# EAGLE board gpio-board (EAGLE 9.6.2)
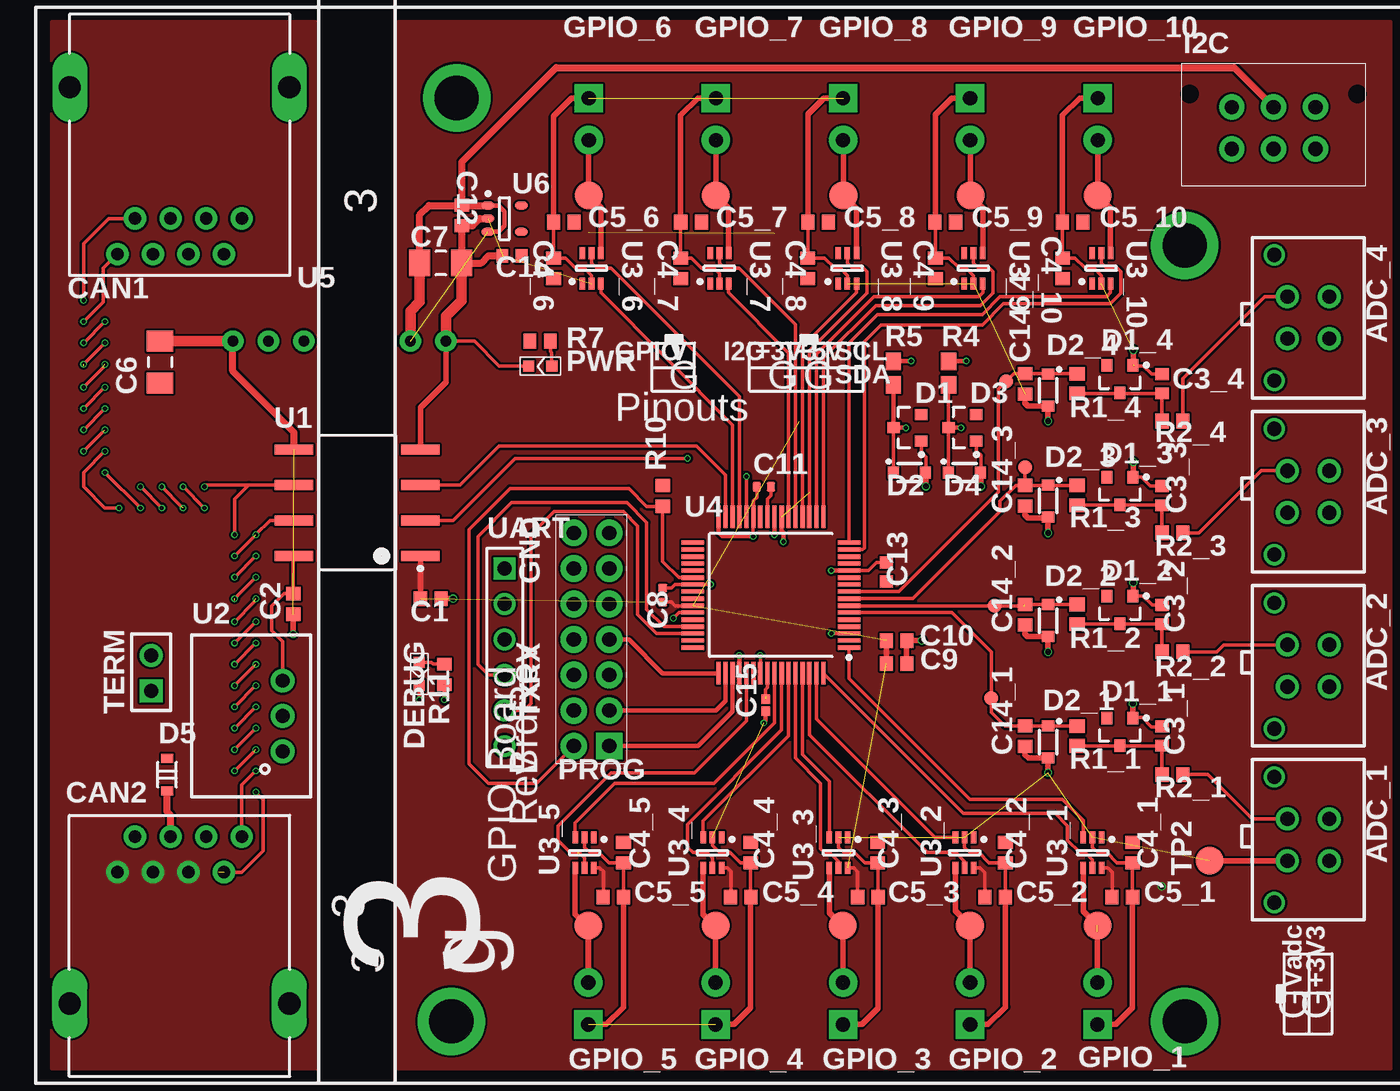
[diagram p0: board, top side]
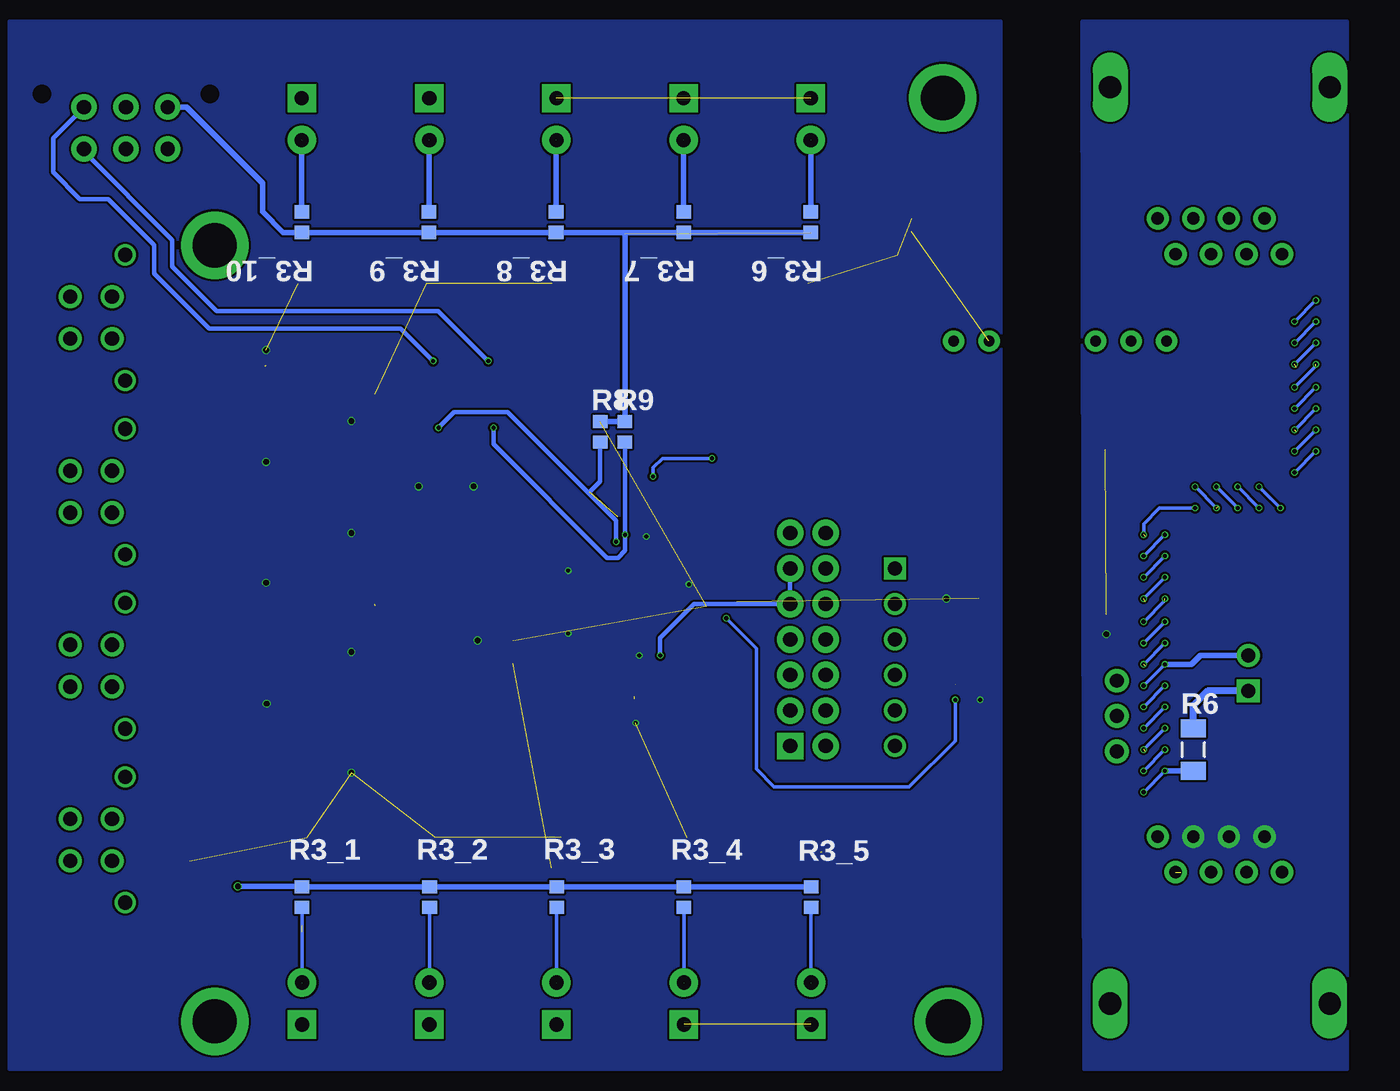
[diagram p1: board, bottom side, seen from below]

No outline drawn. Coordinates in mm, seen from the top.
Copper layers (1*16): Top 0.035mm / dielectric 1.5mm / Bottom 0.035mm
Design rules "GPIO Board": minimum track width 6mil, minimum drill 0.35mm, track to track 6mil, track to pad 6mil, pad to pad 6mil, via to via 6mil, smd to smd 6mil, copper to edge 40mil, drill to drill 6mil, minimum pad ring 0mil, minimum via ring 0mil, stop-mask expansion 4mil, vias tented up to drill 0mil, thermal gap 10mil

## Footprints (pad centres in the part's own frame; a part is rotated, then mirrored left to right if it is on the bottom)
PCB-DEII51DOH0YLT05YINNA-1_1PRIMARY = drill 1.016 pad 1.524: 1 -5.994,3.937; 2 2.997,3.937 | drill 1.016 pad 1.651: 3 0,0; 4 -2.997,0; 5 0,2.997; 6 -2.997,2.997
CAPC1608X90X35ML10T15_1PRIMARY = smd 0.94 x 1.041: 1 -0.737,0; 2 0.737,0
PCB-D6AJCE48RKQ1HIVISM3Y-1_1PRIMARY = smd 0.838 x 0.94: 1 -0.686,0; 2 0.686,0
CAPC3216X94X50ML20T25_1PRIMARY = smd 1.499 x 1.905: 1 -1.499,0; 2 1.499,0
PCB-RS1RQ4I227AAQDZS4V5U-1_1PRIMARY = smd 0.61 x 0.66: 1 -0.508,0; 2 0.508,0
CAPC1005X55X25NL05T10_1PRIMARY = smd 0.66 x 0.61: 1 -0.432,0; 2 0.432,0
PCB-617644-1_1PRIMARY = drill 0.889 pad 1.6: 1 -4.445,6.35; 2 -3.175,8.89; 3 -1.905,6.35; 4 -0.635,8.89; 5 0.635,6.35; 6 1.905,8.89; 7 3.175,6.35; 8 4.445,8.89 | drill 1.6 pad 2.489 long: 9 -7.849,-3.048; 10 7.849,-3.048
PCB-617644-1_2PRIMARY = drill 0.889 pad 1.6: 1 -4.445,6.35; 2 -3.175,8.89; 3 -1.905,6.35; 4 -0.635,8.89; 5 0.635,6.35; 6 1.905,8.89; 7 3.175,6.35; 8 4.445,8.89 | drill 1.6 pad 2.489 long: 9 7.849,-3.048; 10 -7.849,-3.048
PCB-826HQ61C5HRMK636OS7I-1_1PRIMARY = smd 0.889 x 0.787: 1 -0.991,0.94; 2 -0.991,-0.94; 3 0.991,0
PCB-LEB5SPC6MITBTSBK5TX6-1_1PRIMARY = smd 0.787 x 0.889: 1 0,0; 2 2.286,0
PCB-I0FBSBJYI21MW6A9P1H2-1_1PRIMARY = smd 0.635 x 0.838: 1 -1.143,0; 2 1.168,0
PCB-49LZSAGIYOPML94DMXSO-1_1PRIMARY = smd 0.787 x 0.787: 1 0.889,1.143; 2 2.54,1.143
P:EX190Y190D1251 = drill 3.175 pad 4.826: 1 0,0
PCB-EBANZHXDR8KRO84SZ5US-1_1PRIMARY = drill 1.016 pad 2.032 square: 1 0.991,-1.499 | drill 1.016 pad 2.032: 2 0.991,1.499
PCB-8Y24NF48ZEBEN9QZAJWL-1_1PRIMARY = drill 1.016 pad 1.803: 1 2.997,-2.997; 2 0,-2.997; 3 -2.997,-2.997; 4 2.997,0; 5 0,0; 6 -2.997,0 | drill 1.016 pad 1.016: 7 -5.994,0.94 | drill 1.016 pad 0.991: 8 5.994,0.94
PCB-VVNC32FXY3RXRFE3EZXP-1_1PRIMARY = drill 1.016 pad 1.905 square: 1 -7.62,-1.27 | drill 1.016 pad 1.905: 2 -7.62,1.27; 3 -5.08,-1.27; 4 -5.08,1.27; 5 -2.54,-1.27; 6 -2.54,1.27; 7 0,-1.27; 8 0,1.27; 9 2.54,-1.27; 10 2.54,1.27; 11 5.08,-1.27; 12 5.08,1.27; 13 7.62,-1.27; 14 7.62,1.27
PCB-PZR69ND8R73CHJ6EB9MQ-1_1PRIMARY = smd 0.991 x 1.092: 1 -0.711,0; 2 0.711,0
PCB-PZR69ND8R73CHJ6EB9MQ-1_2PRIMARY = smd 0.991 x 1.092: 1 -0.737,0; 2 0.66,0
PCB-2KQ0Q186M0A2Q7QR8G59-1_1PRIMARY = smd 0.94 x 1.041: 1 -0.737,0; 2 0.737,0
PCB-0L9YF81OQ53TI1Q912G7-1_1PRIMARY = smd 0.94 x 1.041: 1 -0.737,0; 2 0.737,0
PCB-2RBVLBEZ7GB2PG7HRA0P-1_1PRIMARY = smd 1.245 x 1.092: 1 -0.838,0; 2 0.838,0
RESC3216X70X50ML05T20_1PRIMARY = smd 1.295 x 1.753: 1 -1.524,0; 2 1.524,0
RESC1608X55X30ML15T15_1PRIMARY = smd 0.889 x 1.041: 1 -0.737,0; 2 0.737,0
PCB-YWUYZLJSEFP2PSQ2ZQH0-1_1PRIMARY = drill 1.016 pad 1.651 square: 1 -1.27,0 | drill 1.016 pad 1.651: 2 1.27,0
PCB-KZRZ332CMU8NBWTQD8UW-1_2PRIMARY = smd 2.007 x 2.007: 1 0,0
PCB-KZRZ332CMU8NBWTQD8UW-1_1PRIMARY = smd 0.991 x 0.991: 1 0,0
PCB-DV9O3AVLIIB4ETIW6Y3O-1_1PRIMARY = smd 2.743 x 0.711: 1 -4.521,3.81; 2 -4.521,1.27; 3 -4.521,-1.27; 4 -4.521,-3.81; 5 4.521,-3.81; 6 4.521,-1.27; 7 4.521,1.27; 8 4.521,3.81
PCB-YSM4WBM1VT1WQ7B8B8LJ-1_1PRIMARY = drill 0.991 pad 1.702: 1 -2.54,0; 2 0,0; 3 2.515,0
PCB-U1BF8RHDO4XCF1EB4J2A-1_1PRIMARY = smd 0.838 x 0.406: 1 -1.092,0.66; 2 -1.092,0; 3 -1.092,-0.66; 4 1.092,-0.66; 5 1.092,0; 6 1.092,0.66
TI-PM-64_V_1PRIMARY = smd 0.305 x 1.6: 1 -3.759,-5.588; 2 -3.251,-5.588; 3 -2.743,-5.588; 4 -2.261,-5.588; 5 -1.753,-5.588; 6 -1.245,-5.588; 7 -0.762,-5.588; 8 -0.254,-5.588; 9 0.254,-5.588; 10 0.762,-5.588; 11 1.245,-5.588; 12 1.753,-5.588; 13 2.261,-5.588; 14 2.743,-5.588; 15 3.251,-5.588; 16 3.759,-5.588; 33 3.759,5.588; 34 3.251,5.588; 35 2.743,5.588; 36 2.261,5.588; 37 1.753,5.588; 38 1.245,5.588; 39 0.762,5.588; 40 0.254,5.588; 41 -0.254,5.588; 42 -0.762,5.588; 43 -1.245,5.588; 44 -1.753,5.588; 45 -2.261,5.588; 46 -2.743,5.588; 47 -3.251,5.588; 48 -3.759,5.588 | smd 1.6 x 0.305: 17 5.588,-3.759; 18 5.588,-3.251; 19 5.588,-2.743; 20 5.588,-2.261; 21 5.588,-1.753; 22 5.588,-1.245; 23 5.588,-0.762; 24 5.588,-0.254; 25 5.588,0.254; 26 5.588,0.762; 27 5.588,1.245; 28 5.588,1.753; 29 5.588,2.261; 30 5.588,2.743; 31 5.588,3.251; 32 5.588,3.759; 49 -5.588,3.759; 50 -5.588,3.251; 51 -5.588,2.743; 52 -5.588,2.261; 53 -5.588,1.753; 54 -5.588,1.245; 55 -5.588,0.762; 56 -5.588,0.254; 57 -5.588,-0.254; 58 -5.588,-0.762; 59 -5.588,-1.245; 60 -5.588,-1.753; 61 -5.588,-2.261; 62 -5.588,-2.743; 63 -5.588,-3.251; 64 -5.588,-3.759
PCB-KC945RGRSQCX7MCRR5DR-1_1PRIMARY = drill 0.762 pad 1.524: 1 0,0; 2 -2.54,0; 3 -5.08,0; 4 -12.7,0; 5 -15.24,0
PCB-DJS7SZGBAKRF40B0AEIK-1_1PRIMARY = smd 0.889 x 0.559: 1 -1.194,0.94; 2 -1.194,0; 3 -1.194,-0.94; 4 1.194,-0.94; 5 1.194,0.94
PCB-EWXEYP75JDH83BBP67M9-1_1PRIMARY = drill 1.016 pad 1.549 square: 1 0,0 | drill 1.016 pad 1.549: 2 2.54,0; 3 5.08,0; 4 7.62,0; 5 10.16,0; 6 12.7,0

## Placement (x,y rotation side)
ADC_1  Molex_43045-0412  [PCB-DEII51DOH0YLT05YINNA-1_1PRIMARY]  117.91,58.42 90 top
ADC_2  Molex_43045-0412  [PCB-DEII51DOH0YLT05YINNA-1_1PRIMARY]  117.91,70.87 90 top
ADC_3  Molex_43045-0412  [PCB-DEII51DOH0YLT05YINNA-1_1PRIMARY]  117.91,83.31 90 top
ADC_4  Molex_43045-0412  [PCB-DEII51DOH0YLT05YINNA-1_1PRIMARY]  117.91,95.76 90 top
C1  0.1uF  [CAPC1608X90X35ML10T15_1PRIMARY]  53.64,74.17 0 top
C2  0.1uF  [CAPC1608X90X35ML10T15_1PRIMARY]  43.81,73.79 270 top
C3_1  Murata_GRT188C8YA225KE13D  [PCB-D6AJCE48RKQ1HIVISM3Y-1_1PRIMARY]  105.94,64.34 270 top
C3_2  Murata_GRT188C8YA225KE13D  [PCB-D6AJCE48RKQ1HIVISM3Y-1_1PRIMARY]  105.94,73.03 270 top
C3_3  Murata_GRT188C8YA225KE13D  [PCB-D6AJCE48RKQ1HIVISM3Y-1_1PRIMARY]  105.94,81.53 270 top
C3_4  Murata_GRT188C8YA225KE13D  [PCB-D6AJCE48RKQ1HIVISM3Y-1_1PRIMARY]  105.94,89.53 270 top
C4_1  0.1uF  [CAPC1608X90X35ML10T15_1PRIMARY]  103.84,56.01 270 top
C4_2  0.1uF  [CAPC1608X90X35ML10T15_1PRIMARY]  94.74,56.01 270 top
C4_3  0.1uF  [CAPC1608X90X35ML10T15_1PRIMARY]  85.62,56.01 270 top
C4_4  0.1uF  [CAPC1608X90X35ML10T15_1PRIMARY]  76.53,56.01 270 top
C4_5  0.1uF  [CAPC1608X90X35ML10T15_1PRIMARY]  67.44,56.01 270 top
C4_6  0.1uF  [CAPC1608X90X35ML10T15_1PRIMARY]  62.43,97.79 90 top
C4_7  0.1uF  [CAPC1608X90X35ML10T15_1PRIMARY]  71.53,97.79 90 top
C4_8  0.1uF  [CAPC1608X90X35ML10T15_1PRIMARY]  80.62,97.79 90 top
C4_9  0.1uF  [CAPC1608X90X35ML10T15_1PRIMARY]  89.74,97.79 90 top
C4_10  0.1uF  [CAPC1608X90X35ML10T15_1PRIMARY]  98.83,97.79 90 top
C5_1  0.1uF  [CAPC1608X90X35ML10T15_1PRIMARY]  103.1,52.83 0 top
C5_2  0.1uF  [CAPC1608X90X35ML10T15_1PRIMARY]  94.01,52.83 0 top
C5_3  0.1uF  [CAPC1608X90X35ML10T15_1PRIMARY]  84.91,52.83 0 top
C5_4  0.1uF  [CAPC1608X90X35ML10T15_1PRIMARY]  75.82,52.83 0 top
C5_5  0.1uF  [CAPC1608X90X35ML10T15_1PRIMARY]  66.7,52.83 0 top
C5_6  0.1uF  [CAPC1608X90X35ML10T15_1PRIMARY]  63.17,101.09 180 top
C5_7  0.1uF  [CAPC1608X90X35ML10T15_1PRIMARY]  72.26,101.09 180 top
C5_8  0.1uF  [CAPC1608X90X35ML10T15_1PRIMARY]  81.36,101.09 180 top
C5_9  0.1uF  [CAPC1608X90X35ML10T15_1PRIMARY]  90.45,101.09 180 top
C5_10  0.1uF  [CAPC1608X90X35ML10T15_1PRIMARY]  99.54,101.09 180 top
C6  TDK_CGA5L1X7R1E106K160AC  [CAPC3216X94X50ML20T25_1PRIMARY]  34.29,91.08 270 top
C7  TDK_CGA5L1X7R1E106K160AC  [CAPC3216X94X50ML20T25_1PRIMARY]  54.36,98.17 180 top
C8  Murata_GCM155R71C104KA55D  [PCB-RS1RQ4I227AAQDZS4V5U-1_1PRIMARY]  70.23,74.42 270 top
C9  Murata_GCM188R72A103KA37D  [CAPC1608X90X35ML10T15_1PRIMARY]  86.97,69.52 180 top
C10  0.1uF  [CAPC1608X90X35ML10T15_1PRIMARY]  86.97,71.17 0 top
C11  Murata_GCM155R71C104KA55D  [PCB-RS1RQ4I227AAQDZS4V5U-1_1PRIMARY]  77.47,82.17 0 top
C12  0.1uF  [CAPC1608X90X35ML10T15_1PRIMARY]  55.88,101.57 270 top
C13  Murata_GRT188C8YA225KE13D  [PCB-D6AJCE48RKQ1HIVISM3Y-1_1PRIMARY]  86.23,76.07 270 top
C14_1  Murata_GCM188R72A103KA37D  [CAPC1608X90X35ML10T15_1PRIMARY]  96.14,64.34 90 top
C14_2  Murata_GCM188R72A103KA37D  [CAPC1608X90X35ML10T15_1PRIMARY]  96.14,73.03 90 top
C14_3  Murata_GCM188R72A103KA37D  [CAPC1608X90X35ML10T15_1PRIMARY]  96.14,81.53 90 top
C14_4  Murata_GCM188R72A103KA37D  [CAPC1608X90X35ML10T15_1PRIMARY]  96.14,89.53 90 top
C15  Cap  [CAPC1005X55X25NL05T10_1PRIMARY]  77.6,66.55 90 top
C16  Murata_GRT188C8YA225KE13D  [PCB-D6AJCE48RKQ1HIVISM3Y-1_1PRIMARY]  59.46,98.68 0 top
CAN1  Assmann_A-2004-2-4-LPS-N-R  [PCB-617644-1_1PRIMARY]  35.69,107.7 180 top
CAN2  Assmann_A-2004-2-4-LPS-N-R  [PCB-617644-1_2PRIMARY]  35.69,48.26 0 top
D1  BZX84B5V1LT1G  [PCB-826HQ61C5HRMK636OS7I-1_1PRIMARY]  87.73,86.39 180 top
D1_1  BZX84B5V1LT1G  [PCB-826HQ61C5HRMK636OS7I-1_1PRIMARY]  102.92,64.64 270 top
D1_2  BZX84B5V1LT1G  [PCB-826HQ61C5HRMK636OS7I-1_1PRIMARY]  102.92,73.36 270 top
D1_3  BZX84B5V1LT1G  [PCB-826HQ61C5HRMK636OS7I-1_1PRIMARY]  102.92,81.86 270 top
D1_4  BZX84B5V1LT1G  [PCB-826HQ61C5HRMK636OS7I-1_1PRIMARY]  102.92,89.87 270 top
D2  CUS520,H3F  [PCB-LEB5SPC6MITBTSBK5TX6-1_1PRIMARY]  86.74,83.19 0 top
D2_1  CUS520,H3F  [PCB-LEB5SPC6MITBTSBK5TX6-1_1PRIMARY]  97.79,65.05 270 top
D2_2  CUS520,H3F  [PCB-LEB5SPC6MITBTSBK5TX6-1_1PRIMARY]  97.79,73.74 270 top
D2_3  CUS520,H3F  [PCB-LEB5SPC6MITBTSBK5TX6-1_1PRIMARY]  97.79,82.3 270 top
D2_4  CUS520,H3F  [PCB-LEB5SPC6MITBTSBK5TX6-1_1PRIMARY]  97.79,90.22 270 top
D3  BZX84B5V1LT1G  [PCB-826HQ61C5HRMK636OS7I-1_1PRIMARY]  91.67,86.39 180 top
D4  CUS520,H3F  [PCB-LEB5SPC6MITBTSBK5TX6-1_1PRIMARY]  90.68,83.19 0 top
D5  ESD12VD3B-TP  [PCB-I0FBSBJYI21MW6A9P1H2-1_1PRIMARY]  34.8,61.57 90 top
DEBUG  LED  [PCB-49LZSAGIYOPML94DMXSO-1_1PRIMARY]  51.69,70.48 270 top
DUMMY1  [P:EX190Y190D1251]  55.5,109.98 0 top
DUMMY2  [P:EX190Y190D1251]  55.12,43.94 0 top
DUMMY3  [P:EX190Y190D1251]  107.57,43.94 0 top
DUMMY4  [P:EX190Y190D1251]  107.57,99.44 0 top
GPIO_1  Molex_0430450212  [PCB-EBANZHXDR8KRO84SZ5US-1_1PRIMARY]  100.33,45.21 0 top
GPIO_2  Molex_0430450212  [PCB-EBANZHXDR8KRO84SZ5US-1_1PRIMARY]  91.24,45.21 0 top
GPIO_3  Molex_0430450212  [PCB-EBANZHXDR8KRO84SZ5US-1_1PRIMARY]  82.14,45.21 0 top
GPIO_4  Molex_0430450212  [PCB-EBANZHXDR8KRO84SZ5US-1_1PRIMARY]  73.03,45.21 0 top
GPIO_5  Molex_0430450212  [PCB-EBANZHXDR8KRO84SZ5US-1_1PRIMARY]  63.93,45.21 0 top
GPIO_6  Molex_0430450212  [PCB-EBANZHXDR8KRO84SZ5US-1_1PRIMARY]  65.94,108.46 180 top
GPIO_7  Molex_0430450212  [PCB-EBANZHXDR8KRO84SZ5US-1_1PRIMARY]  75.03,108.46 180 top
GPIO_8  Molex_0430450212  [PCB-EBANZHXDR8KRO84SZ5US-1_1PRIMARY]  84.12,108.46 180 top
GPIO_9  Molex_0430450212  [PCB-EBANZHXDR8KRO84SZ5US-1_1PRIMARY]  93.22,108.46 180 top
GPIO_10  Molex_0430450212  [PCB-EBANZHXDR8KRO84SZ5US-1_1PRIMARY]  102.34,108.46 180 top
I2C  Molex_43045-0613  [PCB-8Y24NF48ZEBEN9QZAJWL-1_1PRIMARY]  113.92,109.32 0 top
PROG  JTAG  [PCB-VVNC32FXY3RXRFE3EZXP-1_1PRIMARY]  65.15,71.25 90 top
PWR  LED  [PCB-49LZSAGIYOPML94DMXSO-1_1PRIMARY]  63.2,91.95 180 top
R1_1  Panasonic_ERJ-3EKF3901V  [PCB-PZR69ND8R73CHJ6EB9MQ-1_1PRIMARY]  99.87,64.34 270 top
R1_2  Panasonic_ERJ-3EKF3901V  [PCB-PZR69ND8R73CHJ6EB9MQ-1_1PRIMARY]  99.87,73.05 270 top
R1_3  Panasonic_ERJ-3EKF3901V  [PCB-PZR69ND8R73CHJ6EB9MQ-1_1PRIMARY]  99.87,81.56 270 top
R1_4  Panasonic_ERJ-3EKF3901V  [PCB-PZR69ND8R73CHJ6EB9MQ-1_2PRIMARY]  99.87,89.51 270 top
R2_1  Res1  [PCB-2KQ0Q186M0A2Q7QR8G59-1_1PRIMARY]  106.68,61.59 180 top
R2_2  Res1  [PCB-2KQ0Q186M0A2Q7QR8G59-1_1PRIMARY]  106.68,70.36 180 top
R2_3  Res1  [PCB-2KQ0Q186M0A2Q7QR8G59-1_1PRIMARY]  106.68,78.87 180 top
R2_4  Res1  [PCB-2KQ0Q186M0A2Q7QR8G59-1_1PRIMARY]  106.68,86.87 180 top
R3_1  Res1  [PCB-0L9YF81OQ53TI1Q912G7-1_1PRIMARY]  101.32,52.83 90 bottom
R3_2  Res1  [PCB-0L9YF81OQ53TI1Q912G7-1_1PRIMARY]  92.2,52.83 90 bottom
R3_3  Res1  [PCB-0L9YF81OQ53TI1Q912G7-1_1PRIMARY]  83.11,52.83 90 bottom
R3_4  Res1  [PCB-0L9YF81OQ53TI1Q912G7-1_1PRIMARY]  74.02,52.83 90 bottom
R3_5  Res1  [PCB-0L9YF81OQ53TI1Q912G7-1_1PRIMARY]  64.92,52.83 90 bottom
R3_6  Res1  [PCB-0L9YF81OQ53TI1Q912G7-1_1PRIMARY]  64.95,101.09 270 bottom
R3_7  Res1  [PCB-0L9YF81OQ53TI1Q912G7-1_1PRIMARY]  74.04,101.09 270 bottom
R3_8  Res1  [PCB-0L9YF81OQ53TI1Q912G7-1_1PRIMARY]  83.16,101.09 270 bottom
R3_9  Res1  [PCB-0L9YF81OQ53TI1Q912G7-1_1PRIMARY]  92.25,101.09 270 bottom
R3_10  Res1  [PCB-0L9YF81OQ53TI1Q912G7-1_1PRIMARY]  101.35,101.09 270 bottom
R4  Panasonic_ERJ-3GEYJ472V  [PCB-2RBVLBEZ7GB2PG7HRA0P-1_1PRIMARY]  90.68,90.3 90 top
R5  Panasonic_ERJ-3GEYJ472V  [PCB-2RBVLBEZ7GB2PG7HRA0P-1_1PRIMARY]  86.74,90.3 90 top
R6  Panasonic_ERJ-8GEYJ121V  [RESC3216X70X50ML05T20_1PRIMARY]  37.59,63.37 90 bottom
R7  Panasonic_ERJ-3GEYJ331V  [RESC1608X55X30ML15T15_1PRIMARY]  61.47,92.58 180 top
R8  Res1  [PCB-0L9YF81OQ53TI1Q912G7-1_1PRIMARY]  80.01,86.11 90 bottom
R9  Res1  [PCB-0L9YF81OQ53TI1Q912G7-1_1PRIMARY]  78.23,86.11 90 bottom
R10  Res1  [PCB-0L9YF81OQ53TI1Q912G7-1_1PRIMARY]  70.23,81.51 90 top
R11  Panasonic_ERJ-3GEYJ331V  [RESC1608X55X30ML15T15_1PRIMARY]  54.61,68.76 270 top
TERM  Samtec_TSW-102-07-G-S  [PCB-YWUYZLJSEFP2PSQ2ZQH0-1_1PRIMARY]  33.66,68.83 90 top
TP1_1  Test_Pad  [PCB-KZRZ332CMU8NBWTQD8UW-1_2PRIMARY]  101.32,50.8 90 top
TP1_2  Test_Pad  [PCB-KZRZ332CMU8NBWTQD8UW-1_2PRIMARY]  92.2,50.8 0 top
TP1_3  Test_Pad  [PCB-KZRZ332CMU8NBWTQD8UW-1_2PRIMARY]  83.11,50.8 0 top
TP1_4  Test_Pad  [PCB-KZRZ332CMU8NBWTQD8UW-1_2PRIMARY]  74.02,50.8 0 top
TP1_5  Test_Pad  [PCB-KZRZ332CMU8NBWTQD8UW-1_2PRIMARY]  64.92,50.8 0 top
TP1_6  Test_Pad  [PCB-KZRZ332CMU8NBWTQD8UW-1_2PRIMARY]  64.95,103 0 top
TP1_7  Test_Pad  [PCB-KZRZ332CMU8NBWTQD8UW-1_2PRIMARY]  74.04,103 0 top
TP1_8  Test_Pad  [PCB-KZRZ332CMU8NBWTQD8UW-1_2PRIMARY]  83.16,103 0 top
TP1_9  Test_Pad  [PCB-KZRZ332CMU8NBWTQD8UW-1_2PRIMARY]  92.25,103 90 top
TP1_10  Test_Pad  [PCB-KZRZ332CMU8NBWTQD8UW-1_2PRIMARY]  101.35,103 0 top
TP2  Test_Pad  [PCB-KZRZ332CMU8NBWTQD8UW-1_2PRIMARY]  109.35,55.42 0 top
TP3_1  Test_Pad  [PCB-KZRZ332CMU8NBWTQD8UW-1_1PRIMARY]  93.73,67.06 90 top
TP3_2  Test_Pad  [PCB-KZRZ332CMU8NBWTQD8UW-1_1PRIMARY]  93.98,73.66 90 top
TP3_3  Test_Pad  [PCB-KZRZ332CMU8NBWTQD8UW-1_1PRIMARY]  96.14,83.57 90 top
TP3_4  Test_Pad  [PCB-KZRZ332CMU8NBWTQD8UW-1_1PRIMARY]  94.79,89.71 90 top
U1  TI-ISO1050-SOP_DUB-8  [PCB-DV9O3AVLIIB4ETIW6Y3O-1_1PRIMARY]  48.39,81.03 180 top
U2  Recom_Power_R-78E5.0-0.5  [PCB-YSM4WBM1VT1WQ7B8B8LJ-1_1PRIMARY]  43.05,65.79 90 top
U3_1  SN74LVC1T45QDCKRQ1  [PCB-U1BF8RHDO4XCF1EB4J2A-1_1PRIMARY]  100.97,56.01 270 top
U3_2  SN74LVC1T45QDCKRQ1  [PCB-U1BF8RHDO4XCF1EB4J2A-1_1PRIMARY]  91.82,56.01 270 top
U3_3  SN74LVC1T45QDCKRQ1  [PCB-U1BF8RHDO4XCF1EB4J2A-1_1PRIMARY]  82.8,56.01 270 top
U3_4  SN74LVC1T45QDCKRQ1  [PCB-U1BF8RHDO4XCF1EB4J2A-1_1PRIMARY]  73.79,56.01 270 top
U3_5  SN74LVC1T45QDCKRQ1  [PCB-U1BF8RHDO4XCF1EB4J2A-1_1PRIMARY]  64.64,56.01 270 top
U3_6  SN74LVC1T45QDCKRQ1  [PCB-U1BF8RHDO4XCF1EB4J2A-1_1PRIMARY]  65.15,97.79 90 top
U3_7  SN74LVC1T45QDCKRQ1  [PCB-U1BF8RHDO4XCF1EB4J2A-1_1PRIMARY]  74.3,97.79 90 top
U3_8  SN74LVC1T45QDCKRQ1  [PCB-U1BF8RHDO4XCF1EB4J2A-1_1PRIMARY]  83.44,97.79 90 top
U3_9  SN74LVC1T45QDCKRQ1  [PCB-U1BF8RHDO4XCF1EB4J2A-1_1PRIMARY]  92.46,97.79 90 top
U3_10  SN74LVC1T45QDCKRQ1  [PCB-U1BF8RHDO4XCF1EB4J2A-1_1PRIMARY]  101.6,97.79 90 top
U4  TM4C123GH6PMIR  [TI-PM-64_V_1PRIMARY]  77.98,74.42 90 top
U5  NCS1S2405SC  [PCB-KC945RGRSQCX7MCRR5DR-1_1PRIMARY]  39.5,92.58 180 top
U6  ON_Semiconductor_NCV551SN33T1G  [PCB-DJS7SZGBAKRF40B0AEIK-1_1PRIMARY]  58.93,101.35 0 top
UART  SYM-eb5f2251e9703498-3  [PCB-EWXEYP75JDH83BBP67M9-1_1PRIMARY]  58.93,76.33 270 top

## Library data of the parts
ADC_1-ADC_4 C1 C2 C3_1-C3_4 C4_1-C4_10 C5_1-C5_10 C6-C13 C14_1-C14_4 C15 C16 CAN1 CAN2 D1 D1_1-D1_4 D2 D2_1-D2_4 D3-D5 DEBUG DUMMY1-DUMMY4 GPIO_1-GPIO_10 I2C PROG PWR R1_1-R1_4 R2_1-R2_4 R3_1-R3_10 R4-R11 TERM TP1_1-TP1_10 TP2 TP3_1-TP3_4 U1 U2 U3_1-U3_10 U4-U6 UART = GPIO Board

## Nets
CANH: CAN1.7 CAN2.7
NETC2_2: CAN2.2 CAN2.4 CAN2.6
NETC6_2: CAN2.1 CAN2.3 CAN2.5
NETC15_2: C15.2 U4.56
NETPWR_1: R7.1
NETR10_2: R11.2 U4.43
TIVAD1: U4.57
TIVAD2: U4.59
TIVAD3: U4.61
TIVAD4: U4.63
TIVAD5: U4.1
TIVAD6: U4.16
TIVAD7: U4.18
TIVAD8: U4.20
TIVAD9: U4.22
TIVAD10: U4.30
TIVADIR1: U4.53
TIVADIR2: U4.58
TIVADIR3: U4.60
TIVADIR4: U4.62
TIVADIR5: U4.64
TIVADIR6: U4.15
TIVADIR7: U4.17
TIVADIR8: U4.19
TIVADIR9: U4.21
TIVADIR10: U4.29

## Tracks (layer width: path | path; a pad name or v marks a point on that pad's centre or on a via)
CANH  (via drill 0.3 pad 0.46)  (6 unrouted)
  Top 0.254: v41.15,60.33 41.66,59.82 41.66,56.13 40.13,54.61 38.48,54.61 | v39.62,64.9 v41.15,66.42 | v39.62,61.85 41.02,63.25 | v39.62,67.94 41.02,69.34 | v39.62,70.99 v41.15,72.52 | v39.62,74.17 v41.15,75.69 | v39.62,77.22 41.02,78.61 | v35.94,82.17 v37.47,80.64 | v31.37,80.64 30.35,80.64 28.83,82.17 28.83,83.19 v30.35,84.71 | v32.89,82.17 v34.42,80.64 | v28.83,86.23 v30.35,87.76 | v28.83,89.28 30.23,90.68 | v28.83,92.46 v30.35,93.98 | v28.83,95.5 28.83,99.57 30.61,101.35 CAN1.7 | 43.87,79.76 42.16,79.76 v41.15,78.74
  Bottom 0.254: v39.62,64.9 v41.15,63.37 | v39.62,61.85 v41.15,60.33 | v39.62,67.94 v41.15,66.42 | 39.62,74.04 v41.15,72.52 | v39.62,70.99 v41.15,69.47 | v39.62,77.22 v41.15,75.69 | v41.15,78.74 41.15,79.5 40.01,80.64 v37.47,80.64 | v31.37,80.64 v32.89,82.17 | v34.42,80.64 v35.94,82.17 | v28.83,86.23 v30.35,84.71 | v28.83,89.28 v30.35,87.76 | v28.83,92.46 v30.35,90.93 | v28.83,95.5 v30.35,93.98
  Bottom 0.406: 37.59,61.85 v39.62,61.85
CANL  (via drill 0.3 pad 0.46)  (4 unrouted)
  Top 0.254: v41.15,61.85 40.13,60.83 40.13,57.53 39.75,57.15 | v39.62,63.37 v41.15,64.9 | 40.64,82.3 37.59,82.3 v37.47,82.17 | v39.62,78.74 39.62,81.28 40.64,82.3 | v39.62,66.42 v41.15,67.94 | v39.62,69.47 v41.15,70.99 | v39.62,72.52 41.02,73.91 | v39.62,75.69 v41.15,77.22 | v30.35,83.19 v32.89,80.64 | v34.42,82.17 35.81,80.77 | v28.83,84.71 30.23,86.11 | v28.83,87.76 v30.35,89.28 | v28.83,90.93 v30.35,92.46 | v28.83,93.98 30.23,95.38 30.23,97.79 31.24,98.81 | 40.64,82.3 43.87,82.3
  Bottom 0.254: v39.62,66.42 v41.15,64.9 | v39.62,63.37 v41.15,61.85 | v39.62,78.74 v41.15,77.22 | v39.62,69.47 v41.15,67.94 | v39.62,72.52 v41.15,70.99 | v39.62,75.69 v41.15,74.17 | v35.94,80.64 v37.47,82.17 | v32.89,80.64 v34.42,82.17 | v28.83,84.71 v30.35,83.19 | 28.83,90.81 v30.35,89.28 | v28.83,87.76 v30.35,86.23 | v28.83,93.98 v30.35,92.46
  Bottom 0.406: 33.66,70.1 37.08,70.1 37.72,69.47 v39.62,69.47
GND  (via drill 0.3 pad 0.46, 0.41 pad 0.56)  (14 unrouted)
  Top 0.254: 89.05,83.19 89.05,84.3 88.75,84.61 88.75,85.45 | 92.99,83.19 92.99,84.43 92.69,84.73 92.69,85.45 | 105.94,73.71 105.23,73.71 104.57,74.37 103.89,74.37 | 105.94,82.22 105.11,82.22 104.44,82.88 103.89,82.88 | 103.96,90.81 104.6,90.81 105.21,90.22 105.94,90.22 | 103.86,65.66 104.52,65.66 105.18,65 105.94,65 | 71.53,101.09 71.53,98.53 72.29,98.53 73.03,97.79 73.91,97.79 74.3,97.41 74.3,96.7 | 101.6,96.7 101.6,97.28 101.09,97.79 100.46,97.79 99.72,98.53 98.83,98.53 98.83,101.09 | 65.15,96.7 65.15,97.28 64.64,97.79 64.01,97.79 63.27,98.53 62.43,98.53 62.43,101.09 | 77.22,68.83 v77.22,70.1 | v82.3,71.68 83.57,71.68 | 80.62,101.09 80.62,98.53 81.81,98.53 82.55,97.79 82.93,97.79 83.44,97.28 83.44,96.7 | 89.74,101.09 89.74,98.53 90.7,98.53 91.44,97.79 91.95,97.79 92.46,97.28 92.46,96.7 | 73.79,57.1 73.79,56.52 74.3,56.01 75.06,56.01 75.79,55.27 76.53,55.27 76.53,52.83 | 82.8,57.1 82.8,56.39 83.19,56.01 83.95,56.01 84.68,55.27 85.62,55.27 85.62,52.83 | 103.83,52.83 103.83,55.27 102.72,55.27 101.98,56.01 101.35,56.01 100.97,56.39 100.97,57.1 | 94.74,52.83 94.74,55.27 93.57,55.27 92.84,56.01 92.2,56.01 91.82,56.39 91.82,57.1 | 67.44,52.83 67.44,55.27 66.4,55.27 65.66,56.01 65.02,56.01 64.64,56.39 64.64,57.1 | 70.23,74.93 70.87,74.93 71.12,75.18 v73.66,75.18 | 76.96,82.17 76.96,81.41 76.73,81.18 76.73,80.01 76.71,80.01 v76.71,78.61 74.47,78.61 74.22,78.87 | 86.23,76.76 85.52,76.76 84.94,76.17 83.57,76.17 | v52.83,66.93 52.83,67.94 | 60.66,90.81 58.55,90.81 56.77,92.58 54.74,92.58
  Top 0.305: 77.6,66.12 77.6,65.41 v77.47,65.28 | v82.3,76.17 83.57,76.17 | 74.22,78.87 74.22,80.01
  Top 0.406: 109.35,55.42 114.91,55.42 | v92.99,82.19 92.99,83.19 | v89.05,82.19 89.05,83.19 | 103.89,74.37 v103.89,75.31 | v97.79,78.87 97.79,79.93 96.34,79.93 96.14,80.14 96.14,80.8 | v97.79,86.87 97.79,87.94 96.34,87.94 96.14,88.14 96.14,88.8 | 103.89,82.88 v103.89,83.95 | 103.89,90.88 v103.89,91.95 | 103.86,65.66 v103.86,66.65 | 54.74,92.58 54.74,89.66 52.91,87.83 52.91,84.84 | 101.35,109.96 100.05,109.96 98.83,108.74 98.83,101.09 | 92.25,109.96 90.91,109.96 89.74,108.79 89.74,101.09 | 83.16,109.96 81.76,109.96 80.62,108.81 80.62,101.09 | 74.04,109.96 72.75,109.96 71.53,108.74 71.53,101.09 | 64.95,109.96 63.73,109.96 62.43,108.66 62.43,101.09 | 103.83,52.83 103.83,44.91 102.64,43.71 101.32,43.71 | 94.74,52.83 94.74,44.96 93.5,43.71 92.2,43.71 | 85.62,52.83 85.62,44.86 84.48,43.71 83.11,43.71 | 76.53,52.83 76.53,44.91 75.34,43.71 74.02,43.71 | 64.92,43.71 66.19,43.71 67.44,44.96 67.44,52.83 | 54.36,74.17 v55.24,74.17 | 87.68,69.52 87.68,71.17 v88.77,71.17 | v97.79,70.36 97.79,71.45 96.32,71.45 96.14,71.63 96.14,72.29 | v97.79,61.72 97.79,62.76 96.37,62.76 96.14,62.99 96.14,63.6
  Top 0.508: 55.85,98.17 57.28,98.17 57.78,98.68 58.78,98.68 | 55.88,98.2 55.88,100.84 56.64,100.84 57.15,101.35 57.73,101.35
  Top 0.762: 55.85,98.17 55.85,95.48 54.74,94.36 54.74,92.58
  pour Bottom (no thermals): 51.31,115.44 122.3,115.44 122.3,40.51 51.31,40.51
NETADC_1_3
  Top 0.254: 114.91,58.42 112.39,58.42 109.22,61.59 107.42,61.59
NETADC_2_3
  Top 0.254: 114.91,70.87 110.36,70.87 109.86,70.36 107.42,70.36
NETADC_3_3
  Top 0.254: 107.42,78.87 108.58,78.87 113.03,83.31 114.91,83.31
NETADC_4_3
  Top 0.254: 114.91,95.76 113.28,95.76 107.42,89.89 107.42,86.87
NETC2_1
  Top 0.254: 43.87,77.22 43.81,77.17 43.81,74.52 43.16,74.52 42.29,73.66 42.29,71.88 43.05,71.12 43.05,68.3
NETC2_2  (via drill 0.41 pad 0.56)  (1 unrouted)
  Top 0.406: v43.81,71.63 43.81,73.05
  Top 0.508: CAN2.4 35.05,58.67 34.8,58.93 34.8,60.43 | 43.87,84.84 43.87,86.06 39.5,90.42 39.5,92.58
  Top 0.762: 34.31,92.58 39.5,92.58
  pour Bottom (no thermals): 26.54,115.44 45.59,115.44 45.47,40.51 26.54,40.51
NETC3_1_2
  Top 0.254: 105.94,61.59 105.94,63.65 99.87,63.65
NETC3_2_2
  Top 0.254: 105.94,70.36 105.94,72.34 99.57,72.34
NETC3_3_2
  Top 0.254: 105.94,78.87 105.94,80.85 99.87,80.85
NETC3_4_2
  Top 0.254: 99.87,88.85 105.94,88.85 105.94,86.87
NETC6_2
  pour Top (no thermals): 26.54,115.44 45.59,115.44 45.47,40.51 26.54,40.51
NETC7_2  (1 unrouted)
  Top 0.305: 57.73,100.41 58.5,100.41 58.93,100.84 58.93,101.85 58.5,102.29 57.73,102.29
  Top 0.508: 56.13,102.29 57.73,102.29 | 52.86,98.17 52.86,101.62 53.52,102.29 55.88,102.29 55.88,105.41 62.61,112.14 111.1,112.14 113.92,109.32
  Top 0.762: 52.86,98.17 52.86,95.4 52.2,94.74 52.2,92.58
NETC11_2
  Top 0.254: 77.98,82.17 77.98,81.53 77.72,81.28 77.72,80.01
NETC15_2  (1 unrouted)
  Top 0.254: U4.56 77.72,67.82 77.6,67.69 77.6,67.18
NETD1_3  (via drill 0.3 pad 0.46)
  Top 0.254: 86.74,83.19 86.74,86.39
  Top 0.305: v87.63,86.39 86.74,86.39 86.74,89.69 | v78.23,78.74 78.23,80.01
  Bottom 0.305: 78.23,85.37 v78.23,78.74 78.23,77.6 78.74,77.09 79.5,77.09 87.63,85.22 v87.63,86.39
NETD3_3  (via drill 0.3 pad 0.46)  (1 unrouted)
  Top 0.254: 90.68,83.19 90.68,86.39 90.68,89.69
  Top 0.305: 90.68,86.39 v91.57,86.39 | 78.74,80.01 78.74,78.99 78.87,78.87 v78.87,78.23
  Bottom 0.305: v91.57,86.39 90.45,87.5 86.61,87.5 78.87,79.76 v78.87,78.23 | 80.01,85.37 80.01,82.55 80.77,81.79
NETDEBUG_1
  Top 0.254: 54.61,69.49 53.82,69.49 53.72,69.6 52.83,69.6
NETGPIO_1_2  (2 unrouted)
  Top 0.406: 101.32,50.8 100.31,51.79 100.31,54.91 | 101.32,46.71 101.32,50.34
  Bottom 0.254: 101.32,46.71 101.32,52.09
NETGPIO_2_2  (1 unrouted)
  Top 0.406: 91.16,54.91 91.16,51.84 92.2,50.8 92.2,46.71
  Bottom 0.254: 92.2,46.71 92.2,52.09
NETGPIO_3_2  (1 unrouted)
  Top 0.406: 82.14,54.91 82.14,51.71 83.11,50.75 83.11,46.71
  Bottom 0.254: 83.11,46.71 83.11,52.09
NETGPIO_4_2  (1 unrouted)
  Top 0.406: 73.13,54.91 73.13,51.59 74.02,50.7 74.02,46.71
  Bottom 0.254: 74.02,46.71 74.02,52.09
NETGPIO_5_2  (1 unrouted)
  Top 0.406: 64.92,50.65 63.98,51.59 63.98,54.91
  Top 0.432: 64.92,46.71 64.92,50.65
  Bottom 0.254: 64.92,46.71 64.92,52.09
NETGPIO_6_2  (1 unrouted)
  Top 0.406: 64.95,106.96 64.95,103 65.81,102.16 65.81,98.88
  Bottom 0.406: 64.95,101.83 64.95,106.96
NETGPIO_7_2  (1 unrouted)
  Top 0.406: 74.04,106.96 74.04,103 74.95,102.11 74.95,98.88
  Bottom 0.406: 74.04,101.83 74.04,106.96
NETGPIO_8_2  (1 unrouted)
  Top 0.406: 83.16,106.96 83.16,103 84.1,102.06 84.1,98.88
  Bottom 0.406: 83.16,101.83 83.16,106.96
NETGPIO_9_2  (1 unrouted)
  Top 0.406: 92.25,106.96 92.25,103 93.12,102.13 93.12,98.88
  Bottom 0.406: 92.25,101.83 92.25,106.96
NETGPIO_10_2  (1 unrouted)
  Top 0.406: 101.35,106.96 101.35,103 102.26,102.08 102.26,98.88
  Bottom 0.406: 101.35,101.83 101.35,106.96
NETI2C_1  (via drill 0.3 pad 0.46)
  Top 0.305: 86.74,91.16 v88.01,91.16
  Bottom 0.305: 116.92,106.32 116.92,106.12 110.62,99.82 110.62,97.92 107.44,94.74 91.59,94.74 v88.01,91.16
NETI2C_4  (via drill 0.3 pad 0.46)
  Top 0.305: 90.68,91.16 v91.95,91.16
  Bottom 0.305: 116.92,109.32 119.13,107.11 119.13,104.65 117.22,102.74 115.19,102.74 111.89,99.44 111.89,97.41 107.95,93.47 94.26,93.47 v91.95,91.16
NETPWR_1
  Top 0.254: R7.1 62.2,91.85 62.31,91.77 62.31,90.81
NETR6_2
  Bottom 0.508: 33.66,67.56 36.58,67.56 37.59,66.55 37.59,64.9
NETR10_2  (via drill 0.3 pad 0.46)  (1 unrouted)
  Top 0.254: U4.43 71.4,73.18 v70.99,72.77 | v54.61,66.93 54.61,68.05
  Bottom 0.254: v70.99,72.77 68.83,70.61 68.83,61.98 67.56,60.71 57.91,60.71 54.61,64.01 v54.61,66.93
NETU1_2  (via drill 0.3 pad 0.46)
  Top 0.254: 76.22,80.01 v76.22,82.91 | 52.91,79.76 55.24,79.76 59.69,84.2 v72.01,84.2
  Bottom 0.254: v72.01,84.2 75.56,84.2 76.22,83.54 v76.22,82.91
NETU1_3
  Top 0.254: 74.73,80.01 74.73,83.01 72.64,85.09 58.55,85.09 55.75,82.3 52.91,82.3
PWR  (via drill 0.41 pad 0.56)  (5 unrouted)
  Top 0.254: 75.13,52.83 75.13,54.66 74.88,54.91 74.45,54.91 | 101.62,54.91 102.06,54.91 102.39,54.59 102.39,52.83 | 92.48,54.91 92.91,54.91 93.27,54.56 93.27,52.83 | 83.46,54.91 83.9,54.91 84.18,54.63 84.18,52.83 | 65.99,52.83 65.99,54.66 65.73,54.91 65.3,54.91 | 70.23,73.91 70.87,73.91 71.12,73.66 72.39,73.66
  Top 0.406: 52.91,74.17 52.91,77.22 | 86.23,69.52 86.23,71.17
  Bottom 0.406: v105.92,53.59 101.35,53.59 101.32,53.57 64.92,53.57 | 64.95,100.36 102.69,100.36 104.14,101.83 104.14,103.89 109.58,109.32 110.92,109.32 | 80.01,86.84 78.23,86.84 78.23,100.25
  pour Top (no thermals): 51.31,115.44 122.3,115.44 122.3,40.51 51.31,40.51
RESET
  Top 0.254: 63.88,63.63 61.21,60.96 57.78,60.96 56.39,62.36 56.39,79.12 59.31,82.04 67.82,82.04 69.09,80.77 70.23,80.77 70.23,76.83 71.4,75.67 72.39,75.67
RX
  Top 0.254: 58.93,68.71 57.78,68.71 57.02,69.47 57.02,78.61 59.44,81.03 67.69,81.03 69.09,79.63 69.09,73.41 70.33,72.16 72.39,72.16
TCK  (via drill 0.3 pad 0.46)
  Top 0.305: 75.72,68.83 v75.72,70.1
  Bottom 0.305: 66.42,76.33 66.42,73.79 73.28,73.79 75.72,71.35 v75.72,70.1
TDI
  Top 0.305: 74.73,68.83 74.73,66.85 74.04,66.17 66.42,66.17
TDO
  Top 0.305: 74.22,68.83 70.23,68.83 67.82,71.25 66.42,71.25
TIVAD1
  Top 0.254: U4.57 78.23,65.28 73.91,60.96 66.8,60.96 63.98,58.14 63.98,57.1
TIVAD2
  Top 0.254: U4.59 79.22,64.36 73.13,58.27 73.13,57.1
TIVAD3
  Top 0.254: 82.14,57.1 82.14,61.11 80.24,63.02 U4.61
TIVAD4
  Top 0.254: 91.16,57.1 89.71,57.1 81.23,65.58 U4.63
TIVAD5
  Top 0.254: U4.1 83.57,68.45 92.2,59.82 98.81,59.82 100.31,58.32 100.31,57.1
TIVAD6
  Top 0.254: 102.26,96.7 102.26,96.04 101.98,95.76 94.36,95.76 93.09,94.49 85.6,94.49 83.57,92.46 U4.16
TIVAD7
  Top 0.254: 93.12,96.7 93.12,96.04 92.84,95.76 85.34,95.76 81.23,91.64 U4.18
TIVAD8
  Top 0.254: 84.1,96.7 84.1,96.04 80.24,92.18 U4.20
TIVAD9
  Top 0.254: 74.95,96.7 74.95,96.04 79.22,91.75 U4.22
TIVAD10
  Top 0.254: 65.81,96.7 65.81,96.04 75.23,86.59 U4.30
TIVADIR1  (1 unrouted)
  Top 0.254: 64.26,56.01 64.64,55.63 64.64,54.91 | 64.14,56.01 63.63,56.01 62.74,56.9 62.74,57.91 66.55,61.72 72.52,61.72 76.22,65.43 U4.53
TIVADIR2
  Top 0.254: U4.58 78.74,64.77 72.01,58.04 72.01,56.39 72.39,56.01 73.41,56.01 73.79,55.63 73.79,54.91
TIVADIR3
  Top 0.254: U4.60 79.73,62.76 81.53,60.96 81.53,56.26 81.79,56.01 82.17,56.01 82.8,55.37 82.8,54.91
TIVADIR4
  Top 0.254: 91.82,54.91 91.82,55.37 91.19,56.01 89.15,56.01 80.72,64.44 U4.62
TIVADIR5
  Top 0.254: 100.97,54.91 100.97,55.5 100.46,56.01 100.08,56.01 99.19,56.9 99.19,57.91 98.3,58.8 91.75,58.8 U4.64
TIVADIR6
  Top 0.254: 101.6,98.88 101.6,98.17 101.98,97.79 102.74,97.79 103,97.54 103,96.01 102.23,95.25 94.61,95.25 93.09,93.73 85.85,93.73 84.66,92.53 84.66,77.8 84.53,77.67 U4.15
TIVADIR7
  Top 0.254: 92.46,98.88 92.46,98.17 92.84,97.79 93.6,97.79 93.85,97.54 93.85,96.01 92.96,95.12 85.47,95.12 81.74,91.39 U4.17
TIVADIR8
  Top 0.254: 83.44,98.88 83.44,98.17 83.82,97.79 84.58,97.79 84.84,97.54 84.84,96.01 80.72,91.9 U4.19
TIVADIR9
  Top 0.254: 74.3,98.88 74.3,98.17 74.68,97.79 75.69,97.79 79.73,93.75 U4.21
TIVADIR10
  Top 0.254: 65.15,98.88 65.15,98.17 65.53,97.79 66.55,97.79 75.72,88.62 U4.29
TMS
  Top 0.305: 75.23,68.83 75.23,66.09 72.77,63.63 66.42,63.63
TX
  Top 0.254: 58.93,66.17 60.33,66.17 60.83,66.67 60.83,78.74 62.48,80.39 67.44,80.39 68.45,79.38 68.45,73.03 69.8,71.68 72.39,71.68
VOUT1
  Top 0.254: 83.57,73.18 90.91,73.18 93.73,70.36 93.73,66.04 94.72,65.05 99.85,65.05
VOUT2  (1 unrouted)
  Top 0.254: 83.57,73.66 96.06,73.66 | 96.14,73.76 99.87,73.76
VOUT3
  Top 0.254: 96.14,82.27 99.87,82.27 | 96.14,82.27 96.14,83.57 | 96.14,82.27 95.48,82.27 94.36,81.15 94.36,80.39 88.14,74.17 83.57,74.17
VOUT4
  Top 0.254: 83.57,74.68 87.12,74.68 94.23,81.79 94.23,89.15 95.35,90.27 99.87,90.27

## Text on the board
tPlace: 3 | GPIO | V | I2C | +3V3 | +5V | SCL | SDA | G | G | G | Pinouts | GND | RX | TX | .BrdRev | Rev | GPIO Board | 3 | 3 | 3 | g | Vadc | +3V3 | G | G